# Altium PCB agv_drv.PcbDoc (part 2 of 2)
Units mm, origin at the board's own origin, x right, y up, seen from the top; angles counter-clockwise.
Board outline 86 x 57 mm, 2 copper layers (Top Layer, Bottom Layer); 77 components, 81 nets, 398 pads, 169 vias.
Unrouted connection lines stored in the file: 11.
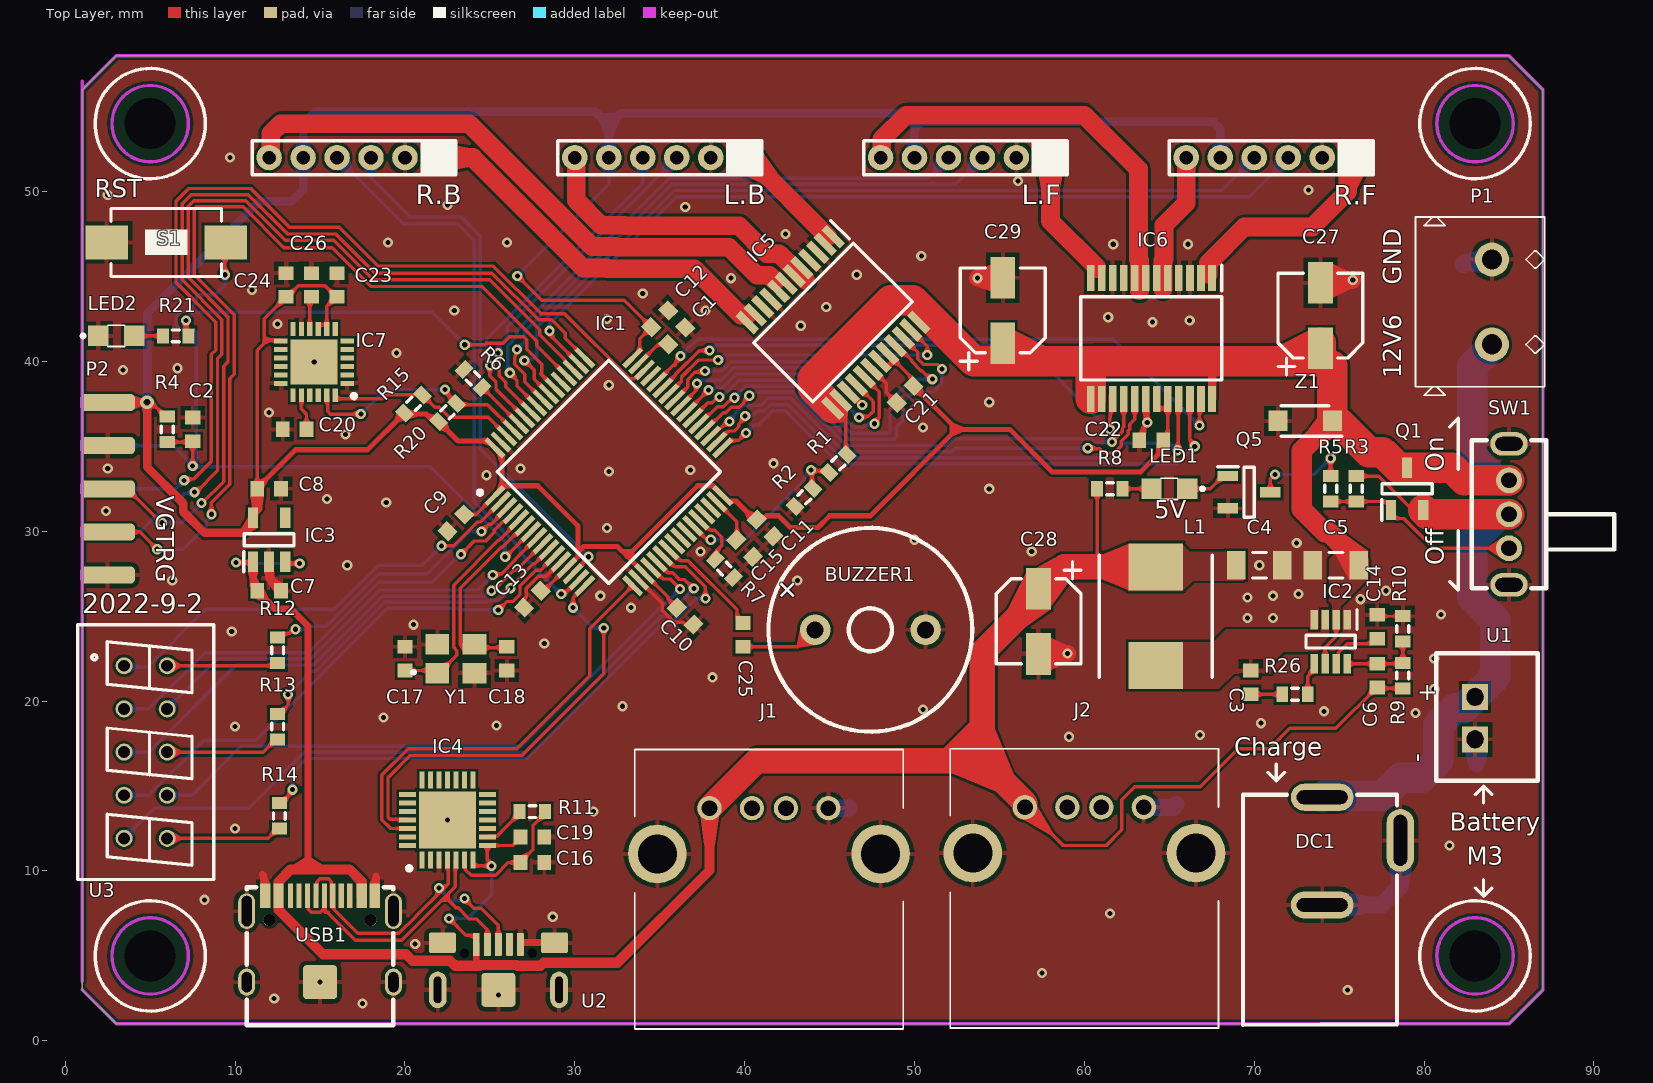
[diagram p0: Top Layer view]

## Silkscreen, mask and mechanical layers (free items; w line width, h text height) (continued)
Top Overlay: (continued)
  lines w0.2: 70.8,15.8 71.3,15.3 ; 71.3,16.3 71.3,15.3 ; 71.8,15.8 71.3,15.3 ; 81.5,27.042 82,26.542 82,30.042 ; 81.5,36.16 82,36.66 82,33.66 ; 83,9 83.5,8.5 ; 83,14.5 83.5,15 ; 83.5,9.5 83.5,8.5 ; 83.5,14 83.5,15 ; 84,9 83.5,8.5 ; 83.5,15 84,14.5 83.5,15
  text "RST" at 1.724,49.297 h1.8
  text "GND" at 79,44.5 h1.8 r90
  text "12V6" at 79,39 h1.8 r90
  text "On" at 81.5,33.5 h1.8 r90
  text "VGTRG" at 5,32.1 h1.8 r270
  text "5V" at 64.1,30.4 h1.8
  text "Off" at 81.5,28 h1.8 r90
  text "2022-9-2" at 1,24.799 h2
  text "+" at 79.6,19.7 h1.8
  text "Charge" at 68.825,16.421 h1.8
  text "-" at 80.4,16.4 h1.8 r90
  text "Battery" at 81.5,12 h1.8
  text "M3" at 82.5,10 h1.8
Bottom Overlay:
  text "3V3 NRST DIO CLK GND" at 10,29 h1.8

## Text inside footprints (layer, text, board x,y; h text height)
BUZZER1: Top Overlay "+" at 43.404,26.414 h1.27 r135